# Altium PCB FAT90V2(kontroller_only).PcbDoc (part 2 of 2)
Units mm, origin at the board's own origin, x right, y up, seen from the top; angles counter-clockwise.
Board outline 187.3 x 121.8 mm, 2 copper layers (Top Layer, Bottom Layer); 106 components, 130 nets, 363 pads, 457 vias.
Unrouted connection lines stored in the file: 5.
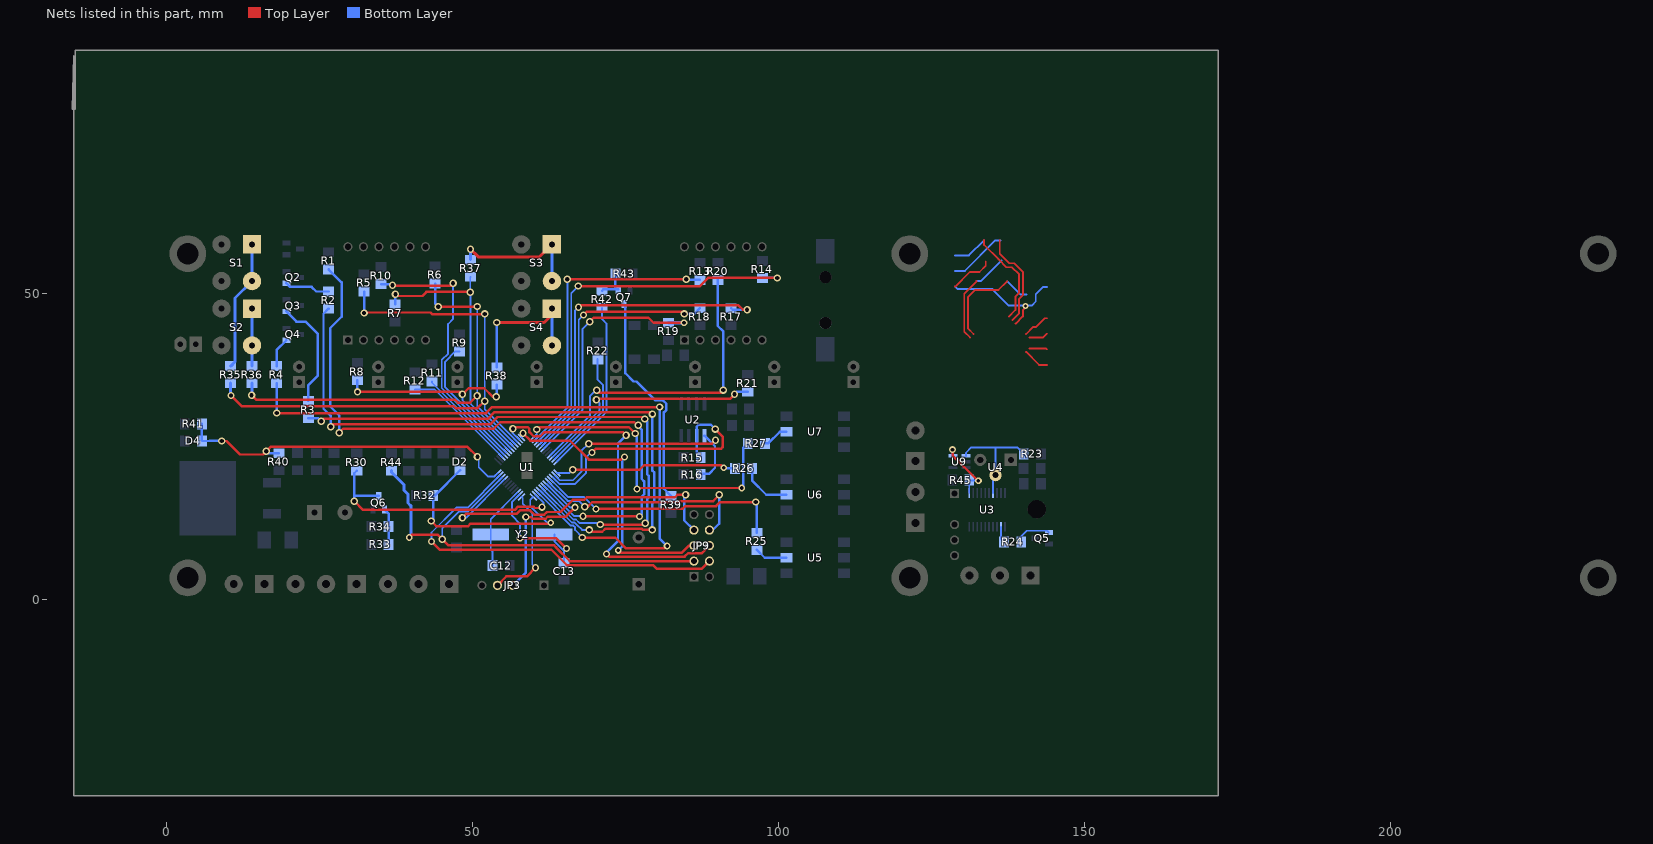
[diagram p2: the nets of this part, all layers, seen from the top]

## Via types
v1: diameter 1.2, hole 0.7, Top Layer to Bottom Layer, 232 vias
v2: diameter 1.1, hole 0.6, Top Layer to Bottom Layer, 195 vias
v3: diameter 1, hole 0.5, Top Layer to Bottom Layer, 18 vias
v4: diameter 1.27, hole 0.7, Top Layer to Bottom Layer, 8 vias
v5: diameter 1.5, hole 1, Top Layer to Bottom Layer, 3 vias
v6: diameter 1.3, hole 0.7, Top Layer to Bottom Layer, 1 vias

## Nets (pads, with @x,y where several pads share a name; then routed paths per layer and width w, separated by ;. In a path a pad name is that pad's centre, name@x,y a point inside that pad or via, vN(x,y) a via of type N, cw(c..) or ccw(c..) an arc to the next point about the centre after c; other vN are vias at no path point) (continued)
NetQ2_1: Q2.1 R2.1 | length 7.5
  Bottom Layer w0.4: Q2.1@19.606,51.652 20.182,51.075 23.725,51.075 24.488,50.312 R2.1@26.507,50.312
NetQ3_1: Q3.1 R3.1 | length 18.2
  Bottom Layer w0.4: Q3.1@19.598,47.052 21.249,45.4 22.725,45.4 24.7,43.425 24.7,36.525 23.207,35.032 R3.1@23.207,32.412
NetQ4_1: Q4.1 R4.1 | length 4.9
  Bottom Layer w0.4: R4.1@18.007,38.112 18.007,40.76 Q4.1@19.598,42.352
NetQ5_1: Q5.1 R24.2 | length 5.9
  Bottom Layer w0.3: R24.2@139.688,9.407 139.688,10.312 140.575,11.2 143.951,11.2 Q5.1@144.202,10.948
NetQ6_1: Q6.1 R33.1 R34.1 | length 6
  Bottom Layer w0.4: Q6.1@35.648,14.698 36.312,14.034 R33.1@36.312,8.993
NetQ7_1: Q7.1 R42.1 R43.1 | length 5.3
  Bottom Layer w0.4: R42.1@71.207,50.437 71.419,50.65 Q7.1@73.85,50.65 ; 73.375,50.65 73.388,50.663 R43.1@73.388,53.207
NetQ7_3: Q7.3 R39.2 | length 35.8
  Bottom Layer w0.4: Q7.3@74.8,48.15 75,47.95 75,36.95 76.35,35.6 76.85,35.6 79.95,32.5 81.175,32.5 81.7,31.975 81.7,30.95 81.3,30.55 81.3,18.081 R39.2@82.493,16.888
NetR23_2: R23.2 U3.17 U4.2 U9.1 | length 19.3
  Bottom Layer w0.3: U9.1@130.675,23.45 130.675,23.95 131.55,24.825 139.081,24.825 R23.2@140.112,23.793 ; U3.17@135.107,17.357 135.107,19.45 135.5,19.843 135.5,24.825 ; R23.2@139.956,23.85 R23.2@140.612,23.193
NetR24_1: R24.1 U3.2 | length 2.6
  Bottom Layer w0.3: U3.2@136.407,11.857 136.407,9.887 R24.1@136.888,9.407
NetR25_1: R25.1 U5.2 | length 5.4
  Bottom Layer w0.4: R25.1@96.493,8.087 97.781,6.8 U5.2@101.325,6.8
NetR26_1: R26.1 U6.2 | length 8.6
  Bottom Layer w0.4: R26.1@95.712,21.393 95.712,19.412 98.025,17.1 U6.2@101.325,17.1
NetR27_1: R27.1 U7.2 | length 4.3
  Bottom Layer w0.4: R27.1@97.812,25.493 98.344,25.493 100.25,27.4 U7.2@101.325,27.4
NetR35_1: R35.1 S1.1 | length 21.3
  Bottom Layer w0.5: R35.1@10.507,38.112 11.225,38.831 11.225,49.235 S1.1@13.999,52.009 S1.1@13.999,58.009
NetR36_1: R36.1 S2.1 | length 9.4
  Bottom Layer w0.5: S2.1@13.999,47.509 S2.1@13.999,41.509 14.007,41.501 R36.1@14.007,38.112
NetR37_1: R37.1 S3.1 | length 22.4
  Top Layer w0.5: v1(49.707,57.232) 50.963,55.975 60.965,55.975 S3.1@62.999,58.009
  Bottom Layer w0.5: R37.1@49.707,55.512 v1(49.707,57.232) ; S3.1@62.999,52.009 S3.1@62.999,58.009
NetR38_1: R38.1 S4.1 | length 23.9
  Top Layer w0.5: v1(53.975,45.25) 61.725,45.25 62.999,46.524 S4.1@62.999,47.509
  Bottom Layer w0.4: v1(53.975,45.25) 54.007,45.218 R38.1@54.007,37.912
  Bottom Layer w0.5: S4.1@62.999,41.509 S4.1@62.999,47.509
NetR45_1: R45.1 U3.11 U9.5 | length 11.2
  Top Layer w0.4: v2(128.475,24.475) 128.475,23.525 132.6,19.4 v2(132.7,19.4)
  Bottom Layer w0.3: U9.5@128.475,23.6 v2(128.475,24.475) ; U3.11@131.207,17.357 131.207,19.232 131.375,19.4 v2(132.7,19.4)
PA3: JP9.7 U1.9 | length 54.6
  Top Layer w0.4: v1(48.375,13.35) 49.05,14.025 57.3,14.025 57.8,14.525 59.45,14.525 60.15,13.825 61.725,13.825 62.176,14.276 64.426,14.276 66.4,16.25 68.275,16.25 68.699,16.674 83.074,16.674 83.5,17.1 v1(84.85,17.1)
  Bottom Layer w0.3: v1(48.375,13.35) 48.982,13.35 U1.9@55.217,19.585
  Bottom Layer w0.4: v1(84.85,17.1) 84.625,16.875 84.625,12.895 JP9.7@86.2,11.32
PA4: JP9.3 R44.2 U1.10 | length 76.1
  Top Layer w0.4: v2(39.675,10.1) 40.15,10.575 44.325,10.575 46.075,8.825 63.375,8.825 63.7,8.5 ; 63.675,8.475 65.91,6.24 JP9.3@86.2,6.24
  Bottom Layer w0.3: v1(45.075,9.825) 45.075,11.6 47.85,14.375 49.3,14.375 U1.10@54.863,19.938
  Bottom Layer w0.5: R44.2@36.806,21.012 36.806,20.743 38.85,18.7 38.85,17.8 39.475,17.175 39.475,15.75 40,15.225 40,10.55 39.55,10.1 v2(39.675,10.1)
PA5: JP9.4 U1.11 | length 64.3
  Top Layer w0.4: v1(43.325,9.45) 44.65,8.125 62.9,8.125 65.425,5.6 79.55,5.6 80.175,4.975 87.475,4.975 JP9.4@88.74,6.24
  Bottom Layer w0.3: v1(43.325,9.45) 43.325,10.925 47.4,15 49.218,15 U1.11@54.51,20.292
PA6: D4.2 R40.2 R41.1 U1.12 | length 59.8
  Top Layer w0.4: v1(9.025,25.875) 9.85,25.875 12.05,23.675 15.8,23.675 17.1,24.975 49.15,24.975 v1(50.825,23.3)
  Bottom Layer w0.3: v1(50.825,23.3) 51.05,23.075 51.05,21.575 52.525,20.1 53.611,20.1 U1.12@54.156,20.645
  Bottom Layer w0.4: R41.1@5.812,28.693 5.812,25.988 5.925,25.875 v1(9.025,25.875) 9.009,25.891 7.105,25.891 ; v1(16.325,24.2) 16.637,23.888 R40.2@18.393,23.888
PB0: R5.2 R35.2 U1.22 | length 91.3
  Top Layer w0.4: v1(10.55,33.325) 12.35,31.525 47,31.525 47.275,31.25 50.85,31.25 51.975,32.375 v1(52.025,32.375) ; v1(32.307,46.807) 32.375,46.875 43.175,46.875 43.475,46.575 51.95,46.575 v1(52.025,46.65)
  Bottom Layer w0.3: v1(52.025,46.65) 52.025,31.05 U1.22@57.338,25.737
  Bottom Layer w0.4: v1(32.307,46.807) R5.2@32.307,50.312
  Bottom Layer w0.5: R35.2@10.507,35.312 10.507,33.368 v1(10.55,33.325)
PB1: R6.2 R36.2 U1.21 | length 75.2
  Top Layer w0.4: v1(13.925,33.375) 14.65,32.65 47.125,32.65 47.625,32.15 49.65,32.15 v1(50.775,33.275) ; v1(44.425,47.825) 50.775,47.825 v1(50.8,47.85)
  Bottom Layer w0.3: v1(50.8,47.85) 50.8,31.568 U1.21@56.985,25.383
  Bottom Layer w0.4: R6.2@43.907,51.612 43.907,48.343 v1(44.425,47.825)
  Bottom Layer w0.5: v1(13.925,33.375) 14.007,33.457 R36.2@14.007,35.312
PB2: R7.2 R37.2 U1.20 | length 45
  Top Layer w0.4: v1(37.425,49.875) 37.725,49.575 41.825,49.575 42.5,50.25 49.575,50.25 v1(49.65,50.175)
  Bottom Layer w0.3: R37.2@49.707,52.712 49.65,52.656 v1(49.65,50.175) 49.7,50.125 49.7,31.961 U1.20@56.631,25.029
  Bottom Layer w0.4: R7.2@37.393,48.188 37.393,49.843 v1(37.425,49.875)
PB3: R8.2 R38.2 U1.19 | length 39.9
  Top Layer w0.4: v1(31.225,33.9) 47.975,33.9 v1(48.375,33.5) 49.375,34.5 51.95,34.5 53.35,33.1 v1(53.925,33.1)
  Bottom Layer w0.3: v1(48.375,33.5) 48.375,32.579 U1.19@56.278,24.676
  Bottom Layer w0.4: R8.2@31.207,35.812 31.207,33.918 v1(31.225,33.9) ; v1(53.925,33.1) 54.007,33.182 R38.2@54.007,35.112
PB4: R9.2 U1.18 | length 21.9
  Bottom Layer w0.3: R9.2@47.907,40.512 47.237,40.512 45.55,38.825 45.55,34.696 U1.18@55.924,24.322
PB5: R10.2 U1.17 | length 44.8
  Top Layer w0.4: v1(36.95,51.325) 37.025,51.25 46.45,51.25 v1(46.85,51.65)
  Bottom Layer w0.3: v1(46.85,51.65) 46.85,45.825 46.025,45 46.025,40.15 45,39.125 45,34.539 U1.17@55.571,23.969
  Bottom Layer w0.4: R10.2@35.107,51.512 36.763,51.512 v1(36.95,51.325)
PB6: R11.2 U1.16 | length 16.9
  Bottom Layer w0.3: R11.2@43.407,35.612 43.407,35.426 U1.16@55.217,23.615
PB7: R12.2 U1.15 | length 18.8
  Bottom Layer w0.3: R12.2@40.607,34.312 43.813,34.312 U1.15@54.863,23.262
PC0: R13.2 U1.26 | length 50.1
  Top Layer w0.4: v1(65.525,52.3) 84.95,52.3 v1(84.975,52.325)
  Bottom Layer w0.3: U1.26@60.308,26.09 65.525,31.307 v1(65.525,52.3) ; v1(84.975,52.325) v1@85.088,52.212
  Bottom Layer w0.4: v1@85.088,52.212 R13.2@87.207,52.212
PC0A:  | length 4.3
  Top Layer w0.3: 140.486,40.433 142.6,38.32 143.9,38.32
PC1: R14.2 U1.27 | length 63.7
  Top Layer w0.4: v1(67.325,51.2) 67.375,51.15 87.15,51.15 88.525,52.525 v1(99.825,52.525)
  Bottom Layer w0.3: U1.27@60.662,25.737 66.15,31.225 66.15,50.025 v1(67.325,51.2)
  Bottom Layer w0.4: R14.2@97.407,52.512 97.419,52.525 v1(99.825,52.525)
PC1A:  | length 2.9
  Top Layer w0.3: 141.052,40.999 143.761,40.999 143.9,40.86
PC2: R17.2 U1.28 | length 55.7
  Top Layer w0.4: v1(67.35,47.75) 67.65,48.05 93.475,48.05 94.2,47.325 v1(94.9,47.325)
  Bottom Layer w0.3: U1.28@61.015,25.383 66.75,31.118 66.75,47.15 v1(67.35,47.75)
  Bottom Layer w0.4: R17.2@92.293,47.588 92.556,47.325 v1(94.9,47.325)
PC2A:  | length 3.1
  Top Layer w0.3: 141.052,42.802 143.302,42.802 143.9,43.4
PC3: R18.2 U1.29 | length 44.1
  Top Layer w0.4: v1(68.175,46.475) 68.725,47.025 84.25,47.025 v1(84.625,46.65)
  Bottom Layer w0.3: U1.29@61.369,25.029 67.4,31.061 67.4,45.7 v1(68.175,46.475)
  Bottom Layer w0.4: v1(84.625,46.65) 86.256,46.65 R18.2@87.193,47.588
PC3A:  | length 4.5
  Top Layer w0.3: 140.486,43.368 141.643,44.525 142.125,44.525 143.54,45.94 143.9,45.94
PC4: R19.2 U1.30 | length 42.4
  Top Layer w0.4: v1(69.175,45.375) 69.825,46.025 78.775,46.025 79.6,45.2 84.575,45.2 v2(84.6,45.225)
  Bottom Layer w0.3: U1.30@61.722,24.676 67.975,30.929 67.975,44.175 v1(69.175,45.375)
  Bottom Layer w0.6: R19.2@82.093,45.188 84.562,45.188 v2(84.6,45.225)
PC5: R20.2 U1.33 | length 53.2
  Top Layer w0.4: v1(70.35,34.15) 70.725,33.775 90.6,33.775 v1(91.025,34.2)
  Bottom Layer w0.3: U1.33@62.783,23.615 69.25,30.082 69.25,33.25 70.15,34.15 v1(70.35,34.15)
  Bottom Layer w0.4: R20.2@90.107,52.212 90.107,44.693 91.025,43.775 v1(91.025,34.2)
PC6: R21.2 U1.34 | length 38
  Top Layer w0.4: v1(70.275,32.6) 70.425,32.75 92.075,32.75 v1(92.85,33.525)
  Bottom Layer w0.3: U1.34@63.137,23.262 70.775,30.9 70.775,32.1 v1(70.275,32.6)
  Bottom Layer w0.4: v1(92.85,33.525) 93.237,33.912 R21.2@95.007,33.912
PD0: JP9.8 U1.41 | length 37.3
  Top Layer w0.4: v1(68.36,15.115) 68.79,15.115 69.55,15.875 83.5,15.875 83.65,16.025 89.35,16.025 90.35,17.025 v1(90.35,17.1)
  Bottom Layer w0.3: U1.41@62.429,19.231 65.561,16.1 67.375,16.1 v1(68.36,15.115)
  Bottom Layer w0.4: JP9.8@88.74,11.32 89.295,11.32 90.325,12.35 90.325,17.075 v1(90.35,17.1)
PD1: JP3.3 U1.42 | length 27.3
  Top Layer w0.4: v1@58.825,13.525 v1(58.75,13.45) 59.6,13.45 59.875,13.175 62,13.175 62.35,13.525 65.275,13.525 v1(66.775,15.025)
  Bottom Layer w0.3: U1.42@62.076,18.878 65.929,15.025 v1(66.775,15.025)
  Bottom Layer w0.4: JP3.3@56.628,2.291 58.75,4.413 v1(58.75,13.45)
PD2: R1.2 U1.43 | length 111.9
  Top Layer w0.4: v1(28.25,27.25) 28.875,27.875 53.475,27.875 54.55,28.95 76.45,28.95 v1@77,28.4 ; v1(68.075,13.6) 68.125,13.55 v1(77.325,13.55)
  Bottom Layer w0.3: U1.43@61.722,18.524 66.646,13.6 v1(68.075,13.6)
  Bottom Layer w0.4: R1.2@26.507,53.912 28.625,51.794 28.625,46.175 26.75,44.3 26.75,31.55 28.25,30.05 v1(28.25,27.25) ; v1@77,28.4 77.65,27.75 77.65,19.7 78.075,19.275 78.075,17.175 77.65,16.75 77.65,13.875 v1(77.325,13.55)
  other v1: 77.1,28.475
PD3: R2.2 U1.44 | length 109.2
  Top Layer w0.4: v1(26.85,28.225) 27.275,28.65 52.975,28.65 54.125,29.8 77.85,29.8 v1(78.175,29.475) ; v1(70.9,12.225) 78.05,12.225 v1(78.25,12.425)
  Bottom Layer w0.3: U1.44@61.369,18.171 66.489,13.05 66.939,13.05 67.489,12.5 v1@70.625,12.5
  Bottom Layer w0.4: R2.2@26.507,47.512 25.675,46.681 25.675,31.15 26.85,29.975 v1(26.85,28.225) ; v1@70.625,12.5 v1(70.9,12.225) ; v1(78.175,29.475) 78.55,29.1 78.55,20.45 78.825,20.175 78.825,16.675 78.55,16.4 78.55,12.7 78.275,12.425 v1(78.25,12.425)
PD4: R3.2 U1.45 | length 97.8
  Top Layer w0.4: v1(25.325,29.1) 25.725,29.5 52.55,29.5 53.65,30.6 79.1,30.6 v1(79.425,30.275) ; v1(69.1,11.35) 69.4,11.05 71.225,11.05 71.7,11.525 77.7,11.525 77.875,11.35 v1(79.4,11.35)
  Bottom Layer w0.3: U1.45@61.015,17.817 66.282,12.55 66.732,12.55 67.077,12.205 67.932,11.35 v1(69.1,11.35)
  Bottom Layer w0.4: R3.2@23.207,29.612 24.813,29.612 v1(25.325,29.1) ; v1(79.4,11.35) 79.425,11.375 79.425,15.725 79.725,16.025 79.725,20.75 79.425,21.05 v1(79.425,30.275)
PD5: R4.2 U1.46 | length 116.5
  Top Layer w0.4: v1(18.025,30.45) 52.25,30.45 53.225,31.425 v1(80.6,31.425) ; v1@68,10.05 v1(67.95,10.1) 73.35,10.1 75.125,8.325 81.425,8.325 v2(81.825,8.725)
  Bottom Layer w0.3: U1.46@60.662,17.463 66.075,12.05 66.525,12.05 66.789,11.786 66.789,11.337 67.95,10.175 v1(67.95,10.1)
  Bottom Layer w0.4: R4.2@18.007,35.312 18.007,30.468 v1(18.025,30.45) ; v1(80.6,31.425) 80.6,9.95 v2(81.825,8.725)
PD6: Q6.3 R30.2 U1.47 | length 44
  Top Layer w0.4: v1(30.7,16.05) 32.125,14.625 56.95,14.625 57.475,15.15 59.975,15.15 60.2,14.925 v1@61.65,14.925 ; v1@61.225,14.925 v1(61.375,15.075)
  Bottom Layer w0.3: U1.47@60.308,17.11 61.65,15.768 v1@61.65,14.925
  Bottom Layer w0.4: v1(30.7,16.05) 30.7,20.606 R30.2@31.107,21.012 R30.2@31.121,20.998 ; 30.7,16.9 30.702,16.898 Q6.3@34.698,16.898
PD7: D2.2 R32.1 U1.48 | length 36.6
  Top Layer w0.4: v1(43.275,12.8) 44.125,11.95 49.3,11.95 49.725,12.375 62.725,12.375 v2@62.75,12.35
  Bottom Layer w0.3: U1.48@59.955,16.756 59.475,16.277 59.475,15.25 62.375,12.35 v2@62.75,12.35
  Bottom Layer w0.4: v1(43.275,12.8) 43.612,13.137 R32.1@43.612,16.993 43.889,16.993 D2.2@47.991,21.095
  other v2: 62.825,12.525
PE0: R25.2 U1.40 | length 41.3
  Top Layer w0.4: v1(70.2,14.775) 70.125,14.775 70.15,14.8 84.35,14.8 84.8,15.25 89.825,15.25 90.475,15.9 v1(96.325,15.9)
  Bottom Layer w0.3: U1.40@62.783,19.585 65.668,16.7 68.275,16.7 v1(70.2,14.775)
  Bottom Layer w0.4: v1@96.312,15.887 v1(96.325,15.9) 96.493,15.732 R25.2@96.493,10.887
PE1: R15.2 U1.39 U2.6 | length 44.4
  Top Layer w0.4: v1(69.55,24) 70.15,24.6 90.625,24.6 90.9,24.875 90.9,26.6 v1(89.675,27.825)
  Bottom Layer w0.3: U1.39@63.137,19.938 64.25,18.825 66.75,18.825 68.55,20.625 68.55,23.175 69.375,24 v1(69.55,24)
  Bottom Layer w0.4: R15.2@87.313,23.182 86.66,23.834 86.66,28.21 86.975,28.525 88.975,28.525 v1(89.675,27.825)
PE2: R16.2 U1.38 U2.5 | length 40.8
  Top Layer w0.4: v1(69.025,25.45) 89.175,25.45 v1(89.725,26)
  Bottom Layer w0.3: U1.38@63.49,20.292 64.307,19.475 66.45,19.475 67.825,20.85 67.825,24.25 v1(69.025,25.45)
  Bottom Layer w0.4: R16.2@87.275,20.5 88.65,20.5 89.65,21.5 89.65,25.03 U2.5@87.93,26.75 ; 89.219,25.461 89.219,25.494 v1(89.725,26)
PE3: R26.2 U1.37 | length 29.8
  Top Layer w0.4: v1(66.425,21.2) 77.35,21.2 78.075,21.925 90.7,21.925 v2(91.1,21.525)
  Bottom Layer w0.3: U1.37@63.844,20.645 65.87,20.645 v1(66.425,21.2)
  Bottom Layer w0.4: v2(91.1,21.525) 91.231,21.393 R26.2@92.912,21.393
PE5: R27.2 U1.25 | length 52.3
  Top Layer w0.4: v1(60.525,27.75) 60.925,28.15 75.55,28.15 76.45,27.25 v1(76.6,27.1) ; v2(76.9,18.025) 77.075,18.2 v2(94.025,18.2)
  Bottom Layer w0.3: U1.25@59.955,26.444 60.525,27.014 v1(60.525,27.75)
  Bottom Layer w0.4: v1(76.6,27.1) 76.85,26.85 76.85,18.075 v2(76.9,18.025) ; v2(94.025,18.2) 94.3,18.475 94.3,24.781 R27.2@95.012,25.493
PE6: JP9.5 U1.24 | length 48.6
  Top Layer w0.4: v1(58.275,27.15) 59.475,25.95 65.925,25.95 69.05,22.825 74.3,22.825 v1@75.025,23.55 ; v2(73.85,8) 74.2,7.65 84.25,7.65 85.38,8.78 JP9.5@86.2,8.78
  Bottom Layer w0.3: U1.24@58.045,26.444 58.275,26.673 v1(58.275,27.15)
  Bottom Layer w0.4: v2(73.85,8) 74.5,8.65 74.5,22.9 v1(74.875,23.275) 74.875,23.4 v1@75.025,23.55
PE7: JP9.6 U1.23 | length 60.8
  Top Layer w0.4: v1(56.625,27.9) 56.875,28.15 59.05,28.15 59.325,27.875 59.325,27.325 60,26.65 61.1,26.65 61.775,27.325 74.6,27.325 v1(75.125,26.8) ; v2(71.925,7.4) 72.35,6.975 84.7,6.975 85.275,7.55 87.51,7.55 JP9.6@88.74,8.78
  Bottom Layer w0.3: v1(56.625,27.9) 56.55,27.825 56.55,27.232 U1.23@57.692,26.09
  Bottom Layer w0.4: v2(71.925,7.4) 71.925,7.675 73.8,9.55 73.8,25.475 v1(75.125,26.8)
PG0: R22.2 U1.35 | length 20
  Bottom Layer w0.3: U1.35@63.49,22.908 71.325,30.743 71.325,35.05 70.475,35.9 R22.2@70.475,39.325
PG1: R42.2 U1.36 | length 28.7
  Bottom Layer w0.3: U1.36@63.844,22.555 71.195,29.905 ; 71.2,29.9 71.925,30.625 71.925,45.075 71.417,45.582 71.207,45.793 R42.2@71.207,47.637
RESET:  | length 29.3
  Top Layer w0.3: 128.9,51.12 131.28,53.5 132.875,53.5 133.912,54.537 133.912,55.207 ; 138.789,45.065 139.975,46.251 139.975,47.275 140.325,47.625 140.325,47.9 v3(140.375,47.95)
  Bottom Layer w0.3: 128.9,51.12 129.32,50.7 134.994,50.7 137.694,48 141.4,48 142.075,48.675 142.075,49.875 143.22,51.02 143.9,51.02 ; v3(140.375,47.95) 140.375,47.8 140.425,47.85 v3@140.425,48
RST: JP3.4 U1.1 | length 20
  Top Layer w0.4: JP3.4@54.088,2.291 55.547,3.75 58.9,3.75 v1(60.325,5.175)
  Bottom Layer w0.3: U1.1@58.045,16.756 58.241,16.561 58.241,15.659 59.8,14.1 59.8,5.7 v1(60.325,5.175)
RX:  | length 25.3
  Top Layer w0.3: 136.18,58.7 136.18,56.47 137.35,55.3 137.725,54.925 138.525,54.925 140,53.45 140,49.775 139.35,49.125 139.35,46.757 138.223,45.631
  Bottom Layer w0.3: 128.9,53.66 130.485,53.66 135.475,58.65 136.3,58.65
TX:  | length 21.9
  Top Layer w0.3: 133.64,58.7 133.64,57.91 135.99,55.56 137.275,54.275 138.175,54.275 139.35,53.1 139.35,50.075 138.75,49.475 138.75,47.289 137.658,46.196
  Bottom Layer w0.3: 128.9,56.2 131.14,56.2 133.64,58.7
XL1:  | length 18
  Top Layer w0.3: 131.895,43.368 131.025,44.238 131.025,49.425 132.175,50.575 135.983,50.575 137.408,52
  Bottom Layer w0.3: 137.408,52 139.596,49.812 140.607,49.812
XL2:  | length 15.9
  Top Layer w0.3: 131.329,42.802 130.375,43.756 130.375,49.967 132.408,52
  Bottom Layer w0.3: 132.408,52 133.119,52 136.512,55.393
XT1: C13.2 U1.2 Y2.2 | length 22.2
  Top Layer w0.4: v2(57.775,10) 63.675,10 v2(65.375,8.3)
  Bottom Layer w0.3: U1.2@57.692,17.11 56.5,15.918 56.5,13.65 57.775,12.375 v2(57.775,10) ; Y2.2@63.4,10.6 63.4,9.525 64.95,7.975 C13.2@64.95,6.1 ; 64.95,7.875 v2(65.375,8.3)
XT2: C12.2 U1.3 Y2.1 | length 13.9
  Bottom Layer w0.3: C12.2@53.288,5.507 53.288,7.887 53,8.175 53,13.125 U1.3@57.338,17.463
pads on no net: BT1.0 HG1.6 JP1.0 JP7.0 JP8.0 U2.7 U3.1 U3.3 U3.5 U3.6 U3.10 U3.12 U3.13 U3.14 U3.15 U3.16 U3.19 U3.20 U5.3 U5.5 U6.3 U6.5 U7.3 U7.5 U9.3 Y1.3 Y1.4
copper on no net: | length 1418.3
  Top Layer w0.4: 151.3,11.32 152.65,12.67 v2(152.65,21.75) ; v2(154.25,13.65) v2(154.25,55.7) ; v2(159.025,8.7) 159.225,8.9 v2(159.225,55.625) ; v2(160.45,6.2) v2(160.45,24.725) ; v2(161.25,27.475) 161.725,27 161.725,23.975 161.5,23.75 161.5,7.025 v2(162.175,6.35) ; v2@162.475,43.025 162.475,42.225 163.475,41.225 v2(163.475,33.15) ; v2(165.225,39.55) 165.225,48.225 v2(165.35,48.35) 165.35,50 166.35,51 v2(166.325,51) ; v2(171.375,21.45) 171.775,21.85 v2(171.775,28.025) ; v2(175.2,39.55) v2(175.2,43.425) ; v2(177.15,49.5) 177.625,49.025 177.625,31.95 v2(178.8,30.775) ; v2(182.825,41.8) 183.02,41.605 183.02,26.5 ; 183.02,52.5 183.02,48.28 v2(183.2,48.1) ; v2(185.5,30.75) 185.5,26.56 185.56,26.5 ; 188.1,26.5 v2(188.1,43.6) ; v2(192.937,58.388) 192.937,49.863 194.2,48.6 194.2,38.2 195.925,36.475 195.925,22.675 v2(195.275,22.025) ; v2(194.9,51.65) 194.9,52.825 197.875,55.8 200.6,55.8 v2(203.187,58.388) ; v2(196.275,51.025) 196.275,53.025 198.325,55.075 v2(202.975,55.075) ; v2(197.1,26.8) 197.725,26.175 v2(197.725,22.875) ; v2@225.675,33.875 225.725,33.825 225.725,22.35 v2(225.825,22.25)
  Top Layer w0.5: v2(226.515,58.14) 226.515,55.36 227.35,54.525 ; 226.9,54.925 v2(230.3,51.525) ; 230.688,23.887 232.775,21.8 v2@232.775,10.225
  Top Layer w0.6: v2(187.45,18.925) 193.5,18.925 194.8,17.625 194.8,7.25 v2@193.6,6.05 ; 213.182,56.288 v2@213.182,57.182 ; 224.588,44.293 226.293,44.293 226.925,44.925 226.925,52.9 225.85,53.975 v2(225.525,53.975)
  Top Layer w1: v6(172.3,4.075) 173.275,5.05 176.9,5.05 177.837,4.112 ; 177.85,4.125 180.675,1.3 210.55,1.3 213.9,4.65 216,4.65 217.25,3.4 217.25,1.25 217.5,1 226.825,1 228,2.175 228,10.8 ; 230.688,23.887 230.688,23.908
  Bottom Layer w0.4: 148.76,6.24 150.02,7.5 153.075,7.5 153.525,7.05 159.325,7.05 159.775,7.5 161.025,7.5 v2(162.175,6.35) ; 148.76,8.78 150.03,10.05 152.3,10.05 153.1,10.85 153.1,12.5 v2(154.25,13.65) ; 148.76,11.32 150.05,12.61 150.05,17.868 150.975,18.793 157.487,18.793 ; 151.3,6.24 160.41,6.24 v2(160.45,6.2) ; 151.3,8.78 152.92,8.78 153.875,7.825 158.15,7.825 v2(159.025,8.7) v2@158.945,8.78 ; v2(152.65,21.75) 153.307,22.407 153.307,23.712 ; 153.307,26.512 153.307,29.432 153.717,29.842 156.239,29.842 ; v2@154.25,55.75 157.125,55.75 158.475,54.4 159.975,54.4 160.175,54.6 175.4,54.6 180.75,49.25 194.5,49.25 v2(196.275,51.025) ; 158.739,30.792 167.508,30.792 170.275,28.025 v2(171.775,28.025) ; v2(159.225,55.625) 175.8,55.625 181.4,50.025 193.275,50.025 v2(194.9,51.65) ; 160.287,18.793 163.074,18.793 163.168,18.888 165.26,18.888 165.714,19.342 ; v2(160.45,24.725) 160.482,24.693 163.712,24.693 ; 160.675,45.4 160.775,45.3 162.6,45.3 ; v2(161.25,27.475) 163.694,27.475 163.712,27.493 ; v2(162.475,43) 162.475,44.625 ; 162.6,45.95 162.6,47.225 163.725,48.35 v2(165.35,48.35) ; v2(163.475,33.15) 166.35,33.15 166.593,32.907 169.988,32.907 169.95,32.869 169.95,31.625 170.725,30.85 177.375,30.85 180.2,33.675 v2(188.075,33.675) ; 164.6,44.65 165.3,44.65 166.357,43.593 170.012,43.593 170.012,42.663 170.775,41.9 182.725,41.9 v2(182.825,41.8) ; 164.6,45.95 165.5,45.95 166.843,47.293 170.012,47.293 170.012,48.912 170.65,49.55 177.1,49.55 v2(177.15,49.5) ; v2(165.225,39.55) 165.268,39.593 170.012,39.593 ; v2(166.325,51) 166.35,51.025 177.45,51.025 180.375,48.1 v2(183.2,48.1) ; 166.512,24.693 166.594,24.775 197.3,24.775 198.705,23.37 200.725,21.35 210.425,21.35 212.5,23.425 212.5,27.9 ; 166.512,27.493 167.707,27.493 169.7,25.5 197.625,25.5 200.925,22.2 209.6,22.2 210.65,23.25 210.65,24.831 ; 168.214,20.292 171.922,24 196.6,24 v2(197.725,22.875) ; v2(171.375,21.45) 171.375,22.125 172.425,23.175 195.825,23.175 198.4,20.6 211.1,20.6 213.775,23.275 219.55,23.275 220.5,24.225 220.5,27.9 ; 172.675,43.55 173.275,43.55 175.625,45.9 200.5,45.9 ; 172.788,32.907 172.825,32.944 172.825,39.581 172.812,39.593 v2@175.2,39.593 ; 172.812,47.293 173.206,46.9 200.5,46.9 ; v2(175.2,43.425) 176.675,44.9 200.5,44.9 ; v2(178.8,30.775) 185.475,30.775 v2(185.5,30.75) ; v2(188.1,43.6) 188.4,43.9 200.5,43.9 ; v2(192.937,58.388) 194.893,58.388 ; 194.893,55.588 200.385,55.588 200.739,55.942 ; v2(195.275,22.025) 195.875,22.025 198.15,19.75 211.875,19.75 214.3,22.175 225.75,22.175 v2(225.825,22.25) ; v2(197.1,26.8) 197.425,26.8 201.2,23.025 202.906,23.025 204.875,24.994 ; v2(202.975,55.075) 203.35,55.075 204.25,55.975 204.25,56.775 204.45,56.975 206.875,56.975 207.225,57.325 207.225,57.85 208.075,58.7 220.319,58.7 220.557,58.462 ; 203.125,56.75 203.125,58.325 v2(203.187,58.388) 205.893,58.388 ; 205.893,55.588 207.084,55.588 208.689,57.192 ; 217.611,57.208 219.207,55.612 220.607,55.612 ; 220.407,58.313 221.588,58.313 223.002,56.898 ; 223.137,57.033 223.261,56.908 ; 223.225,15.55 223.225,19.106 223.712,19.593 ; 224.5,33.875 v2@225.675,33.875 ; 224.5,47.9 227.094,47.9 228.407,49.212 ; 225.202,57.848 226.223,57.848 226.688,58.313 228.007,58.313 ; 228.407,52.107 228.407,52.012 229.812,52.012 v2(230.3,51.525)
  Bottom Layer w0.5: 187.4,16.825 v2@187.4,18.925 ; v2(193.5,5.95) 193.3,5.75 193.3,3.65 195.4,1.55 205.031,1.55 205.888,2.407 205.888,2.669 208.612,5.393 ; 197.393,39.988 197.481,39.9 200.5,39.9 ; 204.875,24.994 205.5,25.619 205.5,27.9 ; 206.5,27.9 206.5,26.506 208.012,24.993 ; 210.65,24.831 210.812,24.993 211.5,25.681 211.5,27.9 ; 223.225,13.65 223.225,11.9 224.587,10.538 224.587,6.407 ; 224.275,38.9 225.675,38.9 226.1,38.475 ; 224.5,40.9 225.45,40.9 226,41.45 ; 225.156,15.55 226.893,17.288 228.593,17.288 ; 225.375,13.65 227.375,13.65 228,13.025 ; 228.188,23.908 228.593,23.503 228.593,20.088
  Bottom Layer w0.6: 211.189,57.192 v2@213.16,57.192 ; v2@213.175,57.182 213.175,53.975 v2(225.525,53.975) ; v2@213.175,57.192 215.095,57.192 215.111,57.208 ; 224.5,39.9 229.275,39.9 230.5,38.675 230.5,34.6 ; 224.5,42.9 225.875,42.9 226.05,43.075 226.05,44.75 225.9,44.9 224.5,44.9 ; 224.5,43.9 226.05,43.9
  Bottom Layer w1: 148.76,3.7 148.76,2.69 149.575,1.875 169.525,1.875 171.725,4.075 v6(172.3,4.075) ; 184,16.825 184,21.525 184.5,22.025 190.475,22.025 191.125,21.375 191.125,17.95 192.879,16.196 192.879,13.471 193.15,13.2 196.425,13.2 196.725,12.9 196.725,4.7 196.226,4.201 ; 185.7,16.825 185.7,20.375 185.75,20.425 v5@189.075,20.425 ; v5(189.075,20.35) v5@189.15,20.425 ; 189.1,16.825 v5@189.1,20.35 ; 203.6,13.2 203.75,13.35 215.6,13.35 217,11.95 ; 208.688,2.407 218.199,2.407 219.105,3.312 217,5.417 217,12.02 219.092,14.111 ; 214.593,2.407 214.9,2.1 ; 221.605,3.312 221.605,6.224 221.787,6.407 ; 224.795,3.309 224.587,3.517 224.587,6.407 225.19,7.01 ; 225.825,44.2 226.175,44.2 v5@226.263,44.287 ; v5@226.55,44 232.85,44 236.6,40.25 236.6,21.95 235.4,20.75 235.4,16.547 235,16.147 235,14.9 ; 228,10.8 228,13.025 231.4,16.425 231.4,18.8 ; 235,10.5 232.875,10.5 229.7,7.325 225.506,7.325 ; 225.19,7.01 225.506,7.325 ; 225.19,7.01 225.506,7.325
  Bottom Layer w1.5: 151.3,3.7 167.994,3.7 170.271,5.977 172.993,8.699 ; 173.293,8.699 175.751,8.699 175.8,8.65 ; 175.9,2.1 175.9,9.4 177.2,10.7 177.2,14.1 179.76,16.659 179.975,16.875 181.975,16.875
  other v1: 87.25,17.15
  other v2: 148.5,1.05 178.375,1.4 172.475,2.5 203.2,3.375 185,4.95 190,4.975 179,5 211.5,5 203.175,6.8 177.5,7.45 192.5,7.45 182.5,7.475 199,7.475 187.45,7.5 165,7.525 206.775,9.3 190,9.975 214.3,9.975 169,10 178.95,10 185,10.025 232.85,10.5 222.1,10.55 211.35,11.8 187.5,12.475 182.45,12.5 198.975,12.5 227.175,14.8 155.9,14.925 169.95,15 175.025,15 214,15 164.95,15.1 164.95,15.1 199,17.225 172.35,17.5 211.5,17.5 206.5,17.525 218.15,19.1 181.9,19.575 195.6,19.75 193.05,21.9 180.05,22 156,22.45 150,22.475 168.1,22.675 224,25.025 214.4,25.15 218.6,25.25 150,27.45 199,27.475 155.925,27.5 231.3,28.65 176.75,29.2 179.575,29.2 193.15,29.3 161.6,29.375 229,29.975 204,30 234,30 190.8,31.775 150,32.45 206.5,32.475 198.35,32.5 221.5,32.525 175.9,32.925 161.15,33.6 225.9,33.9 193.1,34.375 152.5,34.95 179,35 184.025,35 203.975,35 219,35 190.8,36.85 156,37.475 150,37.5 176.025,37.5 181.5,37.5 186.55,37.5 206.45,37.5 216.5,37.525 167.35,38 161.2,38.725 193.05,39.5 152.425,40 179,40 204,40.025 209,40.025 214,40.025 167.45,41.4 228.2,41.975 197.3,42.325 150,42.475 211.5,42.475 216.5,42.475 155.925,42.5 206.5,42.55 152.45,45 204,45 209.025,45 214,45.025 167.5,45.25 229.3,46.525 216.5,47.475 149.975,47.5 156.025,47.5 206.525,47.5 211.5,47.525 196.325,48.6 162.475,49.5 167.5,49.55 152.45,50 191.8,51.525 199,52.05 225.45,52.1 164.9,52.175 170,52.175 149.975,52.5 155.975,52.5 152.45,55 209.45,55.3 216.55,55.3 183,55.525 178.975,55.6 213.16,57.182 150,57.475 155,57.5 179,58.65 174,58.675 189,58.675 184,58.7 168.25,58.8 163.2,58.825
  other v4: 126,11.8 146.5,11.8 126,13.175 146.5,13.175 126,41.75 146.5,41.75 126,43.2 146.5,43.2
  other v5: 185.75,20.325 226.925,44.525

## Polygon pours and split planes (outlines as drawn)
NetC3_2 on Top Layer (hatched 90Degree grid 0.1 track 0.3, remove dead copper): 145.45,0 126.975,0 126.975,25.5 145.45,25.5
GND on Top Layer (hatched 90Degree grid 0.1 track 0.3, remove dead copper): -1.581,-2.702 127.969,-2.702 127.969,-1.4 124.319,-1.58 124.319,25.97 127.969,25.97 127.969,64.023 -1.581,64.023
no net on Top Layer (hatched 90Degree grid 0.1 track 0.3, remove dead copper): 239.3,61.45 146.6,61.45 146.6,-0.95 238.5,-0.95 238.5,61.5 238.175,61.5
NetC3_2 on Bottom Layer (hatched 90Degree grid 0.1 track 0.3, remove dead copper): 145.625,-0.175 126.875,-0.175 126.875,25.625 145.45,25.625 145.45,-0.125
GND on Bottom Layer (hatched 90Degree grid 0.1 track 0.3, remove dead copper): -3.437,-4.052 126.613,-4.052 126.613,-1.375 123.888,-1.375 123.888,26.05 126.613,26.05 126.613,63.173 -3.437,63.173
+5V on Bottom Layer (hatched 90Degree grid 0.1 track 0.3, remove dead copper): 52.925,21.75 59.075,27.9 65.325,21.65 59.075,15.4 52.85,21.625
GND on Bottom Layer (hatched 90Degree grid 0.1 track 0.3, remove dead copper): 52.22,21.547 59.075,14.693 66.032,21.65 59.075,28.607 52.528,22.06
no net on Bottom Layer (hatched 90Degree grid 0.1 track 0.3, remove dead copper): 239.832,62.437 145.357,62.437 145.357,-2.863 238.982,-2.863 238.982,62.537 238.882,62.537

## Keep-outs
Keep-Out Layer:
  lines w0.254: 125.025,33.85 125.05,33.875 ; 125.025,60 125.05,59.975 ; 0,0 0,60 ; 0,0 125,0 125,10 cw(c126,10) 127,10 127,0 145.5,0 145.5,10 cw(c146.5,10) 147.5,10 147.5,0 237.5,0 237.5,60 147.5,60 147.5,45 cw(c146.5,45) 145.5,45 145.5,60 127,60 127,45 cw(c126,45) 125,45 125,60 0,60 ; 0,0 0,60 ; 125,15 ccw(c126,15) 127,15 127,25.5 135,25.5 ccw(c135,26) 135,26.5 127,26.5 127,40 ccw(c126,40) 125,40 125,15 ; 137.5,25.5 cw(c137.5,26) 137.5,26.5 145.5,26.5 145.5,40 cw(c146.5,40) 147.5,40 147.5,15 cw(c146.5,15) 145.5,15 145.5,25.5 137.5,25.5

## Silkscreen, mask and mechanical layers (free items; w line width, h text height)
Mechanical 1:
  circle w0.254: c26.625,14.225 r5.004
  circle w0.254: c64.25,11.202 r5.102
  lines w0.254: -0.15,7.375 47.55,7.375 48.675,7.375
  lines w0.3: 226.125,3.5 235.5,3.5 ; 228.1,56.5 235.5,56.5 ; 233,0.5 233,11.5 ; 233,51.25 233,58.5

## Text inside footprints (layer, text, board x,y; h text height)
JP9: Bottom Overlay "2" at 88.232,1.16 h1 r270; Bottom Overlay "1" at 85.692,1.668 h1 r270; Bottom Overlay "9" at 85.692,15.384 h1 r270; Bottom Overlay "10" at 88.232,15.384 h1 r270
U8: Bottom Overlay "1" at 15.578,19.308 h1 r90; Bottom Overlay "3" at 15.578,14.486 h1 r90